# EAGLE board drehgeber_v3 (EAGLE 5.03)
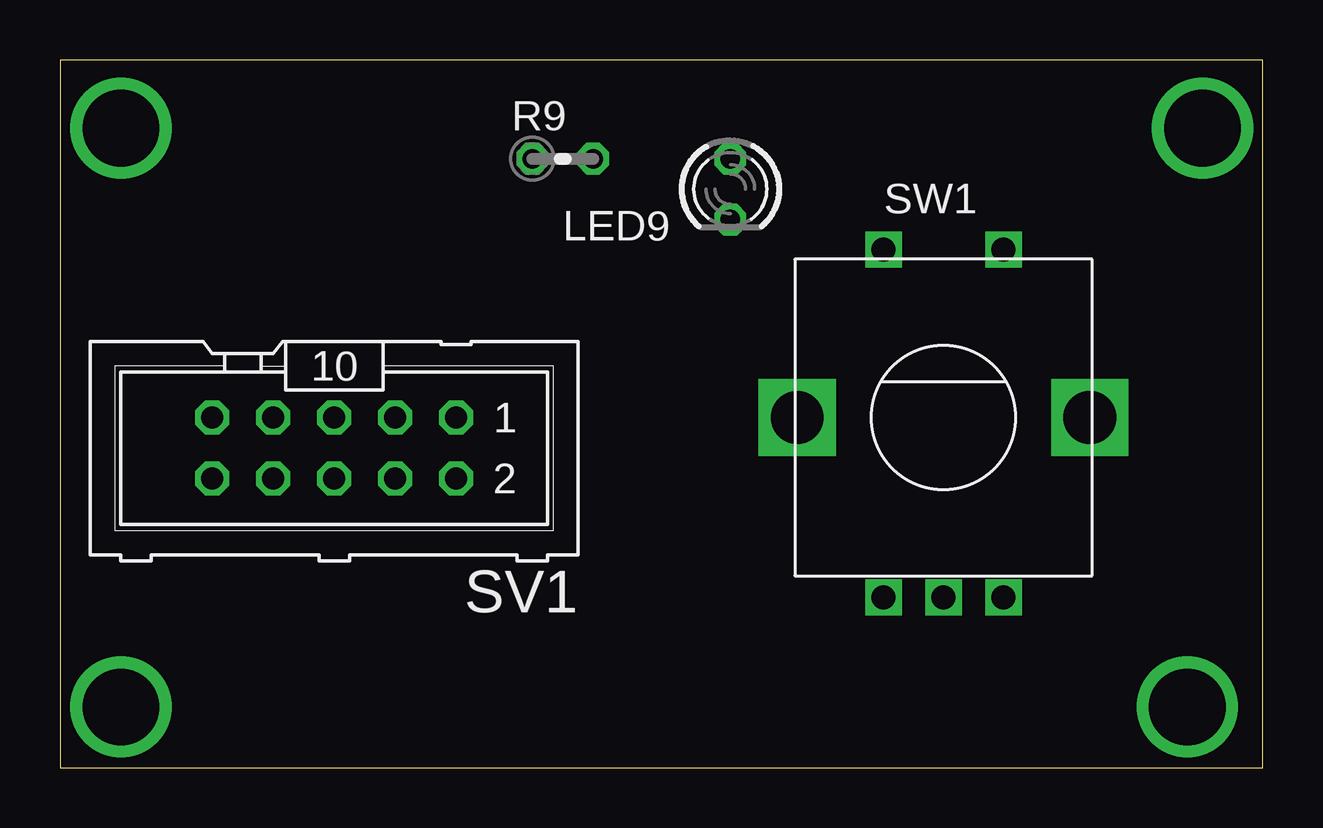
[diagram p0: board, top side]
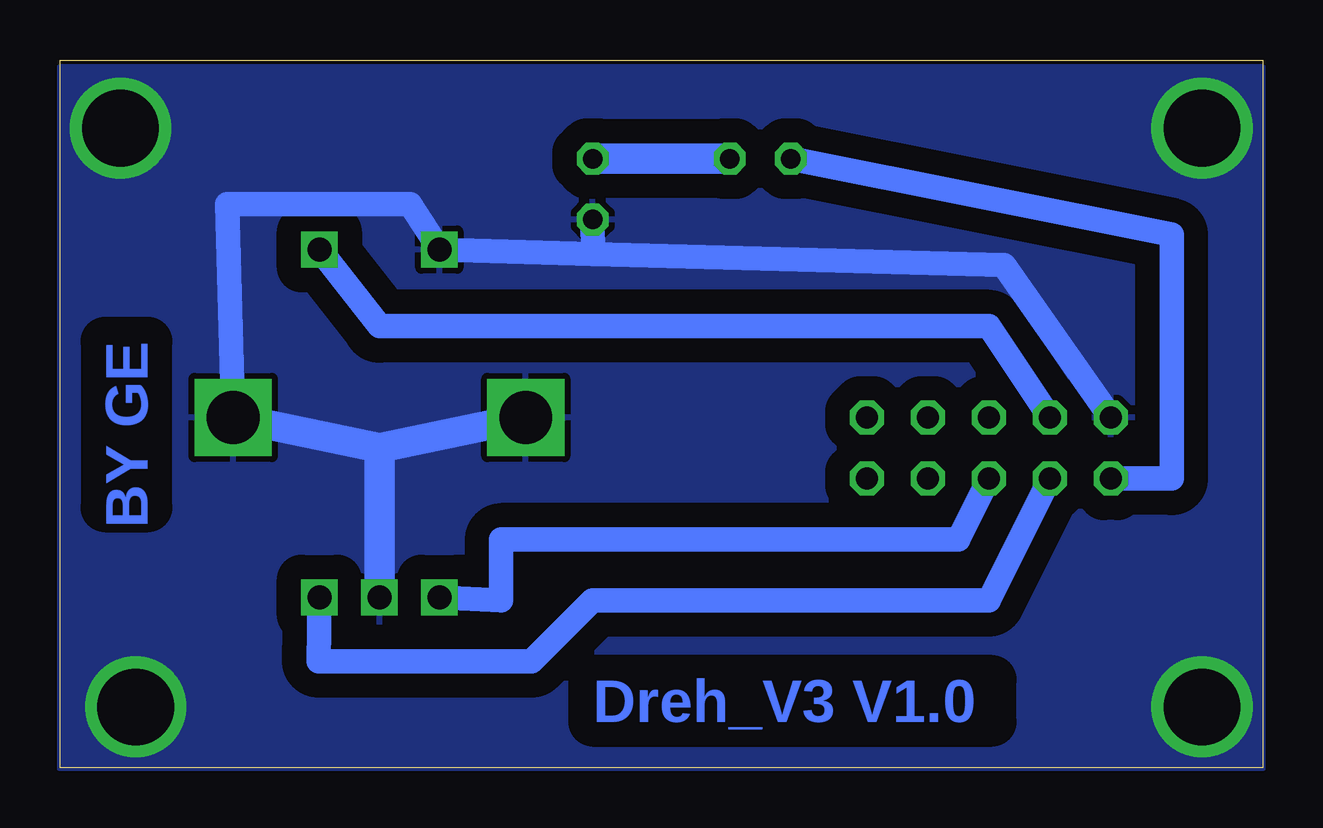
[diagram p1: board, bottom side, seen from below]

Size 50.15 x 29.52 mm. Coordinates in mm from the lower left corner, seen from the top.
Outline: 0,0 50.15,0 50.15,29.52 0,29.52 0,0
Copper layers (1*16): Top 0.035mm / dielectric 1.5mm / Bottom 0.035mm
Design rules "0.35mm": minimum track width 10mil, minimum drill 24mil, track to track 0.35mm, track to pad 0.35mm, pad to pad 0.35mm, via to via 0.35mm, smd to smd 0.35mm, copper to edge 0mil, drill to drill 8mil, minimum pad ring 10mil, minimum via ring 8mil, stop-mask expansion 4mil, vias tented up to drill 0mil, thermal gap 10mil

## Footprints (pad centres in the part's own frame; a part is rotated, then mirrored left to right if it is on the bottom)
LED3MM = drill 0.813 octagon: A -1.27,0; K 1.27,0
0204V = drill 0.813 octagon: 1 -1.27,0; 2 1.27,0
ML10 = drill 0.914 octagon: 1 -5.08,-1.27; 2 -5.08,1.27; 3 -2.54,-1.27; 4 -2.54,1.27; 5 0,-1.27; 6 0,1.27; 7 2.54,-1.27; 8 2.54,1.27; 9 5.08,-1.27; 10 5.08,1.27
ALPS_EC12E_SW = drill 1 square: A -2.5,-7.5; B 2.5,-7.5; C 0,-7.5; D -2.5,7; E 2.5,7 | drill 2.2 square: GND1 -6.1,0; GND2 6.1,0

## Placement (x,y rotation side)
LED9  5mm Grün  [LED3MM]  27.94,24.13 270 top
R9  1K  [0204V]  20.95,25.4 0 top
SV1  PD  [ML10]  11.43,13.34 180 top
SW1  EC12E_SW  [ALPS_EC12E_SW]  36.83,14.61 0 top

## Library data of the parts
LED9 = led
R9 = rcl
SV1 = con-harting-ml
SW1 = switch-alps

## Nets
+5V: R9.1 SV1.10
GND: LED9.K SV1.9 SW1.C SW1.D SW1.GND1 SW1.GND2
N$25: LED9.A R9.2
PD5: SV1.6 SW1.A
PD6: SV1.7 SW1.E
PD7: SV1.8 SW1.B

## Tracks (layer width: path | path; a pad name or v marks a point on that pad's centre or on a via)
+5V
  Bottom 1.016: R9.1 3.81,22.23 3.81,12.06 SV1.10
GND  (via drill 3.2)
  Bottom 1.016: SV1.9 10.79,20.95 27.93,21.43 | 27.93,21.43 SW1.D 35.56,23.5 43.18,23.5 SW1.GND2 | 27.93,21.43 LED9.K
  Bottom 1.27: 36.83,13.34 SW1.C | SW1.GND2 36.83,13.34 | 36.83,13.34 SW1.GND1
  other vias: 2.54,26.67 2.54,2.54 47.62,26.67 46.99,2.54
  pour Bottom (isolate 1.016): 0,0 0,29.21 50.16,29.21 50.16,0
N$25
  Bottom 1.27: R9.2 LED9.A
PD5
  Bottom 1.016: SW1.A 31.75,6.99 31.75,9.53 12.7,9.53 SV1.6
PD6
  Bottom 1.016: SW1.E 36.83,18.41 11.43,18.41 SV1.7
PD7
  Bottom 1.016: SV1.8 11.43,6.99 27.94,6.99 30.48,4.45 39.37,4.45 SW1.B

## Text on the board
Bottom: BY GE | Dreh_V3 V1.0